# Altium PCB MainBoard.PcbDoc (part 4 of 5)
Units mm, origin at the board's own origin, x right, y up, seen from the top; angles counter-clockwise.
Board outline 82.5 x 82.5 mm, 2 copper layers (Top Layer, Bottom Layer); 145 components, 141 nets, 702 pads, 289 vias.
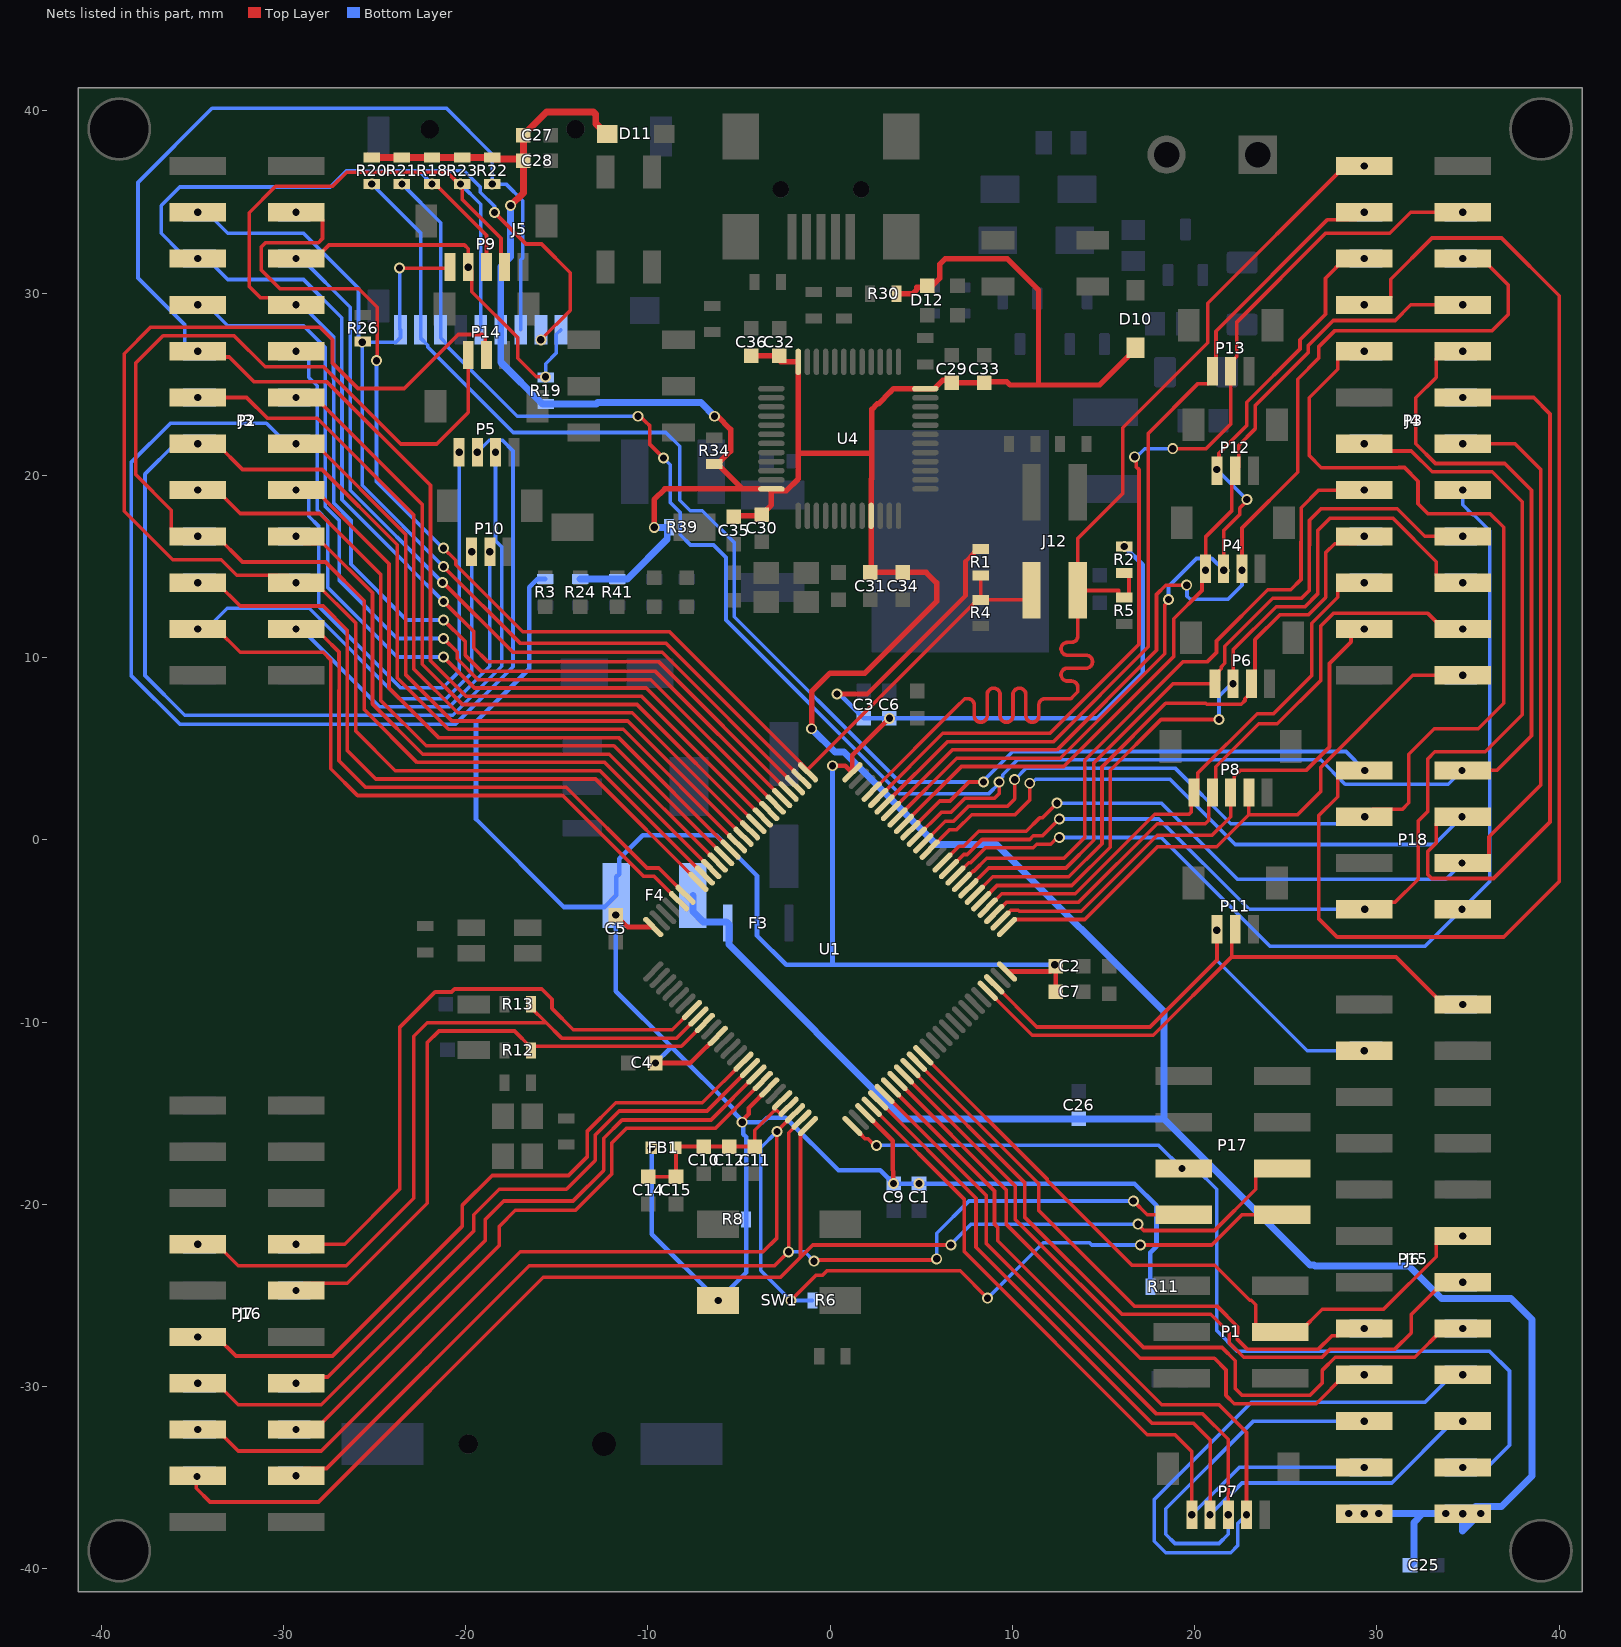
[diagram p2: the nets of this part, all layers, seen from the top]

## Via types
v1: diameter 0.6, hole 0.4, Top Layer to Bottom Layer, 223 vias
v2: diameter 0.6, hole 0.4, Top Layer to Bottom Layer, tented both sides, 66 vias

## Nets (pads, with @x,y where several pads share a name; then routed paths per layer and width w, separated by ;. In a path a pad name is that pad's centre, name@x,y a point inside that pad or via, vN(x,y) a via of type N, cw(c..) or ccw(c..) an arc to the next point about the centre after c; other vN are vias at no path point) (continued)
B10: (continued)
  Top Layer w0.2: U1.47@8.644,-8.28 11.086,-10.722 17.733,-10.722 22.025,-6.43 ; P11.2@22.225,-4.9 22.025,-5.1 22.025,-6.43 ; v1(34.7,-9.03) 33.65,-9.03 31.05,-6.43 22.025,-6.43
B11: J6.21 P11.1 P15.22 U1.48 | length 28.2
  Top Layer w0.2: U1.48@8.998,-7.927 11.339,-10.268 17.545,-10.268 21.225,-6.588 P11.1@21.225,-4.9
  Bottom Layer w0.2: v1(21.209,-4.953) 21.209,-6.604 26.175,-11.57 v1(29.3,-11.57)
B12: J4.23 P3.24 P8.4 U1.51 | length 32.7
  Top Layer w0.2: U1.51@9.705,-4.78 10.112,-4.374 13.964,-4.374 17.956,-0.381 21.209,-0.381 22.971,1.381 ; P8.4@22.971,2.593 22.971,1.381 ; v1(34.7,9.03) 31.969,9.03 26.924,3.985 26.924,2.667 25.638,1.381 22.971,1.381
B13: J4.22 P3.21 P8.3 U1.52 | length 30.7
  Top Layer w0.2: U1.52@9.351,-4.427 9.788,-3.99 9.794,-3.99 9.914,-3.87 10.32,-3.87 10.37,-3.92 13.776,-3.92 17.949,0.254 20.955,0.254 21.971,1.27 P8.3@21.971,2.593 22.171,2.793 22.171,3.492 22.489,3.81 26.107,3.81 27.396,5.099 27.396,9.677 28.579,10.859 28.579,11.17 28.979,11.57 v1(29.3,11.57)
B14: J4.21 P3.22 P8.2 U1.53 | length 36.1
  Top Layer w0.2: U1.53@8.998,-4.073 9.025,-4.073 9.682,-3.416 13.638,-3.416 17.942,0.889 20.584,0.889 20.771,1.076 20.771,2.393 21.158,2.78 21.158,4.013 23.517,6.372 24.533,6.372 26.924,8.763 26.924,11.745 27.603,12.424 32.796,12.424 33.65,11.57 v1(34.7,11.57)
B15: J4.20 P3.19 P8.1 U1.54 | length 31
  Top Layer w0.2: U1.54@8.644,-3.72 8.65,-3.72 9.408,-2.962 13.45,-2.962 17.808,1.397 19.685,1.397 19.802,1.514 19.802,2.424 20.171,2.793 20.171,3.668 23.426,6.923 24.322,6.923 26.416,9.017 26.416,11.879 27.85,13.313 27.85,13.71 28.25,14.11 v1(29.3,14.11)
C0: J7.12 P16.11 U1.15 | length 38.6
  Top Layer w0.2: v1(-34.7,-27.27) -33.65,-27.27 -32.599,-28.321 -27.305,-28.321 -20.193,-21.209 -20.193,-20.066 -18.542,-18.415 -14.351,-18.415 -13.335,-17.399 -13.335,-16.002 -11.757,-14.424 -7.01,-14.424 U1.15@-4.755,-12.17
C1: J7.13 P16.14 U1.16 | length 33.4
  Top Layer w0.2: v1(-29.3,-29.81) -28.962,-29.472 -27.567,-29.472 -19.558,-21.463 -19.558,-20.574 -18.161,-19.177 -14.471,-19.177 -12.881,-17.587 -12.881,-16.19 -11.569,-14.878 -6.757,-14.878 U1.16@-4.402,-12.523
C2: J7.14 P16.13 U1.17 | length 40.3
  Top Layer w0.2: v1(-34.7,-29.81) -33.65,-29.81 -32.472,-30.988 -27.927,-30.988 -18.923,-21.984 -18.923,-20.828 -17.907,-19.812 -14.104,-19.812 -12.427,-18.135 -12.427,-16.378 -11.416,-15.367 -6.539,-15.367 U1.17@-4.048,-12.877
C3: J7.15 P16.16 U1.18 | length 35.1
  Top Layer w0.2: v1(-29.3,-32.35) -28.25,-32.35 -18.161,-22.261 -18.161,-21.209 -17.272,-20.32 -13.97,-20.32 -11.973,-18.323 -11.973,-16.618 -11.176,-15.821 -6.285,-15.821 U1.18@-3.695,-13.23
C4: J6.7 P15.8 U1.33 | length 35.5
  Top Layer w0.2: U1.33@3.695,-13.23 3.695,-13.236 9.652,-19.193 9.652,-21.082 17.018,-28.448 21.082,-28.448 21.717,-29.083 21.717,-30.48 22.171,-30.934 26.666,-30.934 28.25,-29.35 v1(29.3,-29.35)
C5: J6.10 P15.9 U1.34 | length 41.8
  Top Layer w0.2: U1.34@4.048,-12.877 4.048,-12.882 10.16,-18.994 10.16,-20.828 17.186,-27.854 21.504,-27.854 22.225,-28.575 22.225,-30.099 22.606,-30.48 26.311,-30.48 27.008,-29.783 27.008,-29.091 27.705,-28.394 32.066,-28.394 33.65,-26.81 v1(34.7,-26.81)
C6: J4.11 P3.12 P18.4 U1.63 | length 73.7
  Top Layer w0.2: U1.63@5.462,-0.538 6.562,0.562 6.952,0.562 7.771,1.381 10.144,1.381 10.952,2.189 v2(10.952,3.106) ; v1(34.671,1.27) 33.65,1.27 33.25,0.87 33.25,-0.169 32.796,-0.623 32.796,-1.917 33.003,-2.124 36.397,-2.124 39.497,0.976 39.497,23.368 38.595,24.27 v1(34.7,24.27)
  Bottom Layer w0.2: v2(10.952,3.106) 11.06,3.106 11.275,3.321 18.65,3.321 22.225,-0.254 33.147,-0.254 v1(34.671,1.27)
C7: J4.10 P3.9 P18.3 U1.64 | length 70
  Top Layer w0.2: U1.64@5.109,-0.184 6.309,1.016 6.764,1.016 7.583,1.835 9.709,1.835 10.12,2.246 v2(10.12,3.302) ; v1(29.3,26.81) 28.25,26.81 27.85,26.41 27.85,25.818 26.289,24.257 26.289,21.082 26.949,20.422 31.185,20.422 31.191,20.428 31.508,20.428 32.254,19.681 32.254,18.443 32.815,17.882 36.22,17.882 36.957,17.145 36.957,7.493 35.56,6.096 33.147,6.096 31.75,4.699 31.75,2.032 31.388,1.67 29.737,1.67 v1(29.337,1.27)
  Bottom Layer w0.2: v2(10.12,3.302) 10.755,3.937 18.923,3.937 21.971,0.889 28.869,0.889 29.25,1.27 v1(29.337,1.27)
C8: J4.9 J5.7 P3.10 P18.2 R21.1 U1.65 | length 120.5
  Top Layer w0.2: v1(-10.541,23.241) -10.433,23.241 -10.073,22.882 -10.055,22.882 -9.906,22.733 -9.906,21.717 v1(-9.144,20.955) ; U1.65@4.755,0.17 6.091,1.505 6.611,1.505 7.395,2.289 9.02,2.289 9.271,2.54 v2(9.271,3.175) ; v1(34.67,3.81) P18.2@34.7,3.81 36.576,3.81 38.481,5.715 38.481,19.177 37.011,20.647 33.215,20.647 32.131,21.731 32.131,24.252 33.25,25.371 33.25,26.41 33.65,26.81 v1(34.7,26.81)
  Bottom Layer w0.2: v1(-23.495,35.978) -21.371,33.854 J5.7@-21.371,27.989 -21.371,27.539 -20.975,27.143 -20.975,27.042 -17.174,23.241 v1(-10.541,23.241) ; v1(-9.144,20.955) -9.144,20.951 -8.767,20.574 -8.767,18.503 -8.224,17.96 -8.224,16.74 -7.659,16.176 -6.397,16.176 -5.715,15.494 -5.715,12.058 3.822,2.521 8.688,2.521 9.271,3.104 v2(9.271,3.175) 9.271,3.283 9.466,3.479 9.466,3.573 10.285,4.391 26.909,4.391 28.252,3.048 33.909,3.048 v1(34.67,3.81)
C9: J4.8 J5.8 P3.7 P18.1 R20.1 U1.66 | length 152.9
  Top Layer w0.2: U1.66@4.402,0.523 4.407,0.523 6.017,2.132 6.577,2.132 7.62,3.175 v2(8.417,3.175) ; v1(29.3,29.35) 30.35,29.35 30.75,29.75 30.75,30.75 33.02,33.02 36.83,33.02 40.005,29.845 40.005,-2.286 36.957,-5.334 27.813,-5.334 26.797,-4.318 26.797,1.318 27.85,2.371 27.85,3.41 28.25,3.81 v1(29.337,3.81)
  Bottom Layer w0.2: v1(-25.146,35.978) -22.471,33.303 J5.8@-22.471,27.989 -22.471,27.539 -22.075,27.143 -22.075,27.042 -17.385,22.352 -9.017,22.352 -8.255,21.59 -8.255,18.633 -7.683,18.061 -7.012,18.061 -5.261,16.31 -5.261,12.246 3.81,3.175 v2(8.417,3.175) 8.417,3.246 10.016,4.845 28.302,4.845 v1(29.337,3.81)
C10: J3.20 J5.1 P2.19 P9.2 R19.1 U1.78 | length 67.1
  Top Layer w0.2: v1(-29.3,31.89) -28.25,31.89 -27.501,32.639 -20.066,32.639 -19.857,32.43 v1(-19.857,31.422) -19.657,31.222 -19.657,30.071 -17.145,27.559 -17.145,26.416 -16.129,25.4 v1(-15.621,25.4) ; v2(-21.271,14.123) -21.235,14.123 -17.399,10.287 -9.216,10.287 U1.78@-1.927,2.998
  Bottom Layer w0.2: v1(-29.3,31.89) -29,31.89 -26.33,29.22 -26.33,19.182 v2(-21.271,14.123) ; R19.1@-15.607,25.363 -15.607,26.121 -15.021,26.706 -15.021,27.739 J5.1@-14.771,27.989
C11: J3.19 J5.2 P2.20 P9.3 R18.1 U1.79 | length 92
  Top Layer w0.2: R18.1@-21.669,35.978 -18.857,33.166 P9.3@-18.857,31.422 ; v2(-21.209,13.081) -19.558,11.43 -19.558,10.541 -18.796,9.779 -9.415,9.779 U1.79@-2.28,2.644 ; v1(-18.415,34.417) -16.691,32.693 -15.835,32.693 -14.26,31.118 -14.26,29.047 v1(-15.875,27.432)
  Bottom Layer w0.2: v1(-21.844,35.978) -22.569,36.703 ; v2(-21.209,13.081) -23.168,15.04 -23.168,15.047 -26.784,18.663 -26.784,25.481 -26.797,25.494 -26.797,28.648 -28.893,30.743 -33.053,30.743 -34.2,31.89 J3.19@-34.6,31.89 v1(-34.7,31.89) -35.053,32.243 -35.672,32.243 -36.703,33.274 -36.703,34.798 -35.687,35.814 -27.432,35.814 -26.543,36.703 -25.728,36.703 -25.706,36.681 -23.836,36.681 -23.814,36.703 -22.569,36.703 ; v1(-18.415,34.417) -18.415,34.755 -19.196,35.536 -19.196,35.818 -20.081,36.703 -22.569,36.703
C12: J3.18 J5.5 P2.17 P9.4 R23.1 U1.80 | length 79
  Top Layer w0.2: v1(-29.3,29.35) -29.7,29.75 -31.274,29.75 -31.877,30.353 -31.877,34.404 -30.426,35.854 -27.303,35.854 -26.526,36.632 -21.022,36.632 -20.368,35.978 R23.1@-20.193,35.978 -20.193,35.144 -18.057,33.008 -18.057,31.622 P9.4@-17.857,31.422 ; v2(-21.209,12.065) -20.012,10.868 -20.012,10.12 -19.134,9.242 -9.585,9.242 U1.80@-2.634,2.291
  Bottom Layer w0.2: v1(-29.3,29.35) -29,29.35 -27.251,27.601 -27.251,25.306 -27.238,25.293 -27.238,18.475 -26.289,17.526 -26.289,15.113 -23.241,12.065 v2(-21.209,12.065) ; v1(-20.281,35.978) -19.171,34.869 J5.5@-19.171,27.989
C13: J7.7 P16.8 U1.7 | length 34.4
  Top Layer w0.2: v1(-29.3,-22.19) -26.635,-22.19 -23.622,-19.177 -23.622,-10.294 -21.675,-8.347 -20.769,-8.347 -20.605,-8.183 -15.82,-8.183 -15.262,-8.741 -15.262,-9.249 -14.097,-10.414 -8.662,-10.414 -7.589,-9.341 U1.7@-7.584,-9.341
C14: J7.8 P16.7 R13.2 U1.8 | length 40.9
  Top Layer w0.2: v1(-34.7,-22.19) -33.65,-22.19 -32.472,-23.368 -26.543,-23.368 -22.841,-19.666 -22.841,-10.776 -22.098,-10.033 -15.579,-10.033 ; R13.2@-16.42,-9.017 -16.42,-9.192 -15.579,-10.033 ; U1.8@-7.23,-9.695 -8.413,-10.877 -14.735,-10.877 -15.579,-10.033
C15: J7.9 P16.10 R12.1 U1.9 | length 34.6
  Top Layer w0.2: v1(-29.3,-24.73) -28.9,-24.33 -26.489,-24.33 -22.098,-19.939 -22.098,-11.122 -21.463,-10.487 -17.315,-10.487 -16.42,-11.382 R12.1@-16.42,-11.557 ; R12.1@-16.42,-11.506 -16.245,-11.331 -8.16,-11.331 -7.848,-11.02 U1.9@-6.877,-10.048
D0: J3.17 P2.18 U1.81 | length 50.3
  Top Layer w0.2: v2(-21.209,11.049) -20.466,10.306 -20.466,9.932 -19.322,8.788 -9.838,8.788 U1.81@-2.988,1.937
  Bottom Layer w0.2: v1(-34.7,29.35) -34.2,29.35 -33.053,28.203 -28.893,28.203 -27.705,27.016 -27.705,25.118 -27.692,25.105 -27.692,18.28 -26.924,17.512 -26.924,14.224 -23.749,11.049 v2(-21.209,11.049)
D1: J3.16 P2.15 U1.82 | length 43.2
  Top Layer w0.2: v2(-21.209,10.033) -19.51,8.334 -10.091,8.334 U1.82@-3.341,1.584
  Bottom Layer w0.2: v1(-29.3,26.81) -29,26.81 -28.6,26.41 -28.6,25.371 -28.146,24.917 -28.146,18.092 -27.559,17.505 -27.559,13.843 -23.749,10.033 v2(-21.209,10.033)
D2: J3.15 J5.3 P2.16 R22.1 U1.83 | length 91
  Top Layer w0.2: v1(-34.7,26.81) -34.38,26.49 -32.967,26.49 -31.601,25.124 -27.603,25.124 -21.93,19.451 -21.93,9.829 -19.981,7.88 -10.344,7.88 U1.83@-3.695,1.23
  Bottom Layer w0.2: v1(-34.7,26.81) -35,26.81 -35.4,27.21 -35.4,28.249 -37.973,30.822 -37.973,36.068 -33.909,40.132 -21.052,40.132 -18.542,37.622 v1(-18.542,35.978) -17.781,35.978 -16.872,35.069 -16.872,31.928 -16.971,31.829 J5.3@-16.971,27.989
D3: J3.14 P2.13 U1.84 | length 40.1
  Top Layer w0.2: v1(-29.3,24.27) -28.25,24.27 -22.384,18.404 -22.384,9.641 -20.169,7.426 -10.598,7.426 U1.84@-4.048,0.877
D4: J3.13 P2.14 U1.85 | length 45.1
  Top Layer w0.2: v1(-34.7,24.27) -32.017,24.27 -30.87,23.123 -28.143,23.123 -22.838,17.819 -22.838,9.376 -20.434,6.972 -10.856,6.972 -4.407,0.523 U1.85@-4.402,0.523
D5: J3.12 P2.11 P5.2 U1.86 | length 97.8
  Top Layer w0.2: v1(-29.3,21.73) -28.25,21.73 -23.292,16.772 -23.292,9.068 -20.742,6.518 -11.104,6.518 U1.86@-4.755,0.17
  Bottom Layer w0.2: v1(-29.3,21.73) -29.8,21.73 -30.93,22.86 -36.195,22.86 -38.354,20.701 -38.354,9.017 -35.687,6.35 -20.553,6.35 -17.399,9.504 -17.399,21.336 -17.979,21.916 -18.703,21.916 v1(-19.357,21.262)
D6: J3.11 P2.12 P5.3 U1.87 | length 91
  Top Layer w0.2: v1(-34.7,21.73) -33.65,21.73 -32.24,20.32 -27.879,20.32 -23.749,16.19 -23.749,8.88 -20.933,6.064 -11.357,6.064 U1.87@-5.109,-0.184
  Bottom Layer w0.2: v1(-34.7,21.73) -35.928,21.73 -37.592,20.066 -37.592,9.017 -35.414,6.839 -20.706,6.839 -18.015,9.53 -18.015,16.072 -18.357,16.414 v1(-18.357,21.262)
D7: J3.10 P2.9 P5.1 U1.88 | length 65
  Top Layer w0.2: v1(-29.3,19.19) -28.25,19.19 -24.203,15.143 -24.203,8.328 -21.485,5.61 -11.61,5.61 U1.88@-5.462,-0.538
  Bottom Layer w0.2: v1(-29.3,19.19) -29,19.19 -28.6,18.79 -28.6,17.751 -28.067,17.218 -28.067,12.834 -23.571,8.338 -21.253,8.338 -20.357,9.234 v1(-20.357,21.262)
D8: J4.19 P3.20 P6.2 U1.55 | length 43.4
  Top Layer w0.2: U1.55@8.291,-3.366 8.296,-3.366 9.155,-2.508 13.261,-2.508 15.367,-0.402 15.367,3.815 18.156,6.604 v1(21.336,6.604) ; v1(22.106,8.562) 22.106,10.43 24.471,12.795 26.048,12.795 26.743,13.49 26.743,15.986 26.754,15.997 26.754,16.975 27.432,17.653 30.861,17.653 33.25,15.264 33.25,14.51 33.65,14.11 v1(34.7,14.11)
  Bottom Layer w0.2: v1(21.336,6.604) 21.336,7.874 22.024,8.562 v1(22.106,8.562)
D9: J4.18 P3.17 P6.3 U1.56 | length 35.1
  Top Layer w0.2: U1.56@7.937,-3.012 7.943,-3.012 8.923,-2.032 13.095,-2.032 14.913,-0.214 14.913,4.003 18.403,7.493 20.599,7.493 20.659,7.433 22.553,7.433 22.76,7.64 22.76,7.741 23.106,8.087 P6.3@23.106,8.562 23.306,8.762 23.306,10.988 24.659,12.341 26.236,12.341 27.197,13.302 27.197,15.767 27.68,16.25 28.9,16.25 v1(29.3,16.65)
D10: J4.17 P3.18 P6.1 U1.57 | length 42
  Top Layer w0.2: U1.57@7.584,-2.659 8.7,-1.543 12.942,-1.543 14.459,-0.026 14.459,4.216 18.805,8.562 P6.1@21.106,8.562 21.306,8.762 21.306,9.241 21.452,9.387 21.452,9.484 21.652,9.684 21.652,10.618 24.283,13.249 25.86,13.249 26.289,13.678 26.289,16.153 26.3,16.164 26.3,17.537 26.924,18.161 31.115,18.161 32.626,16.65 v1(34.7,16.65)
D11: J4.16 P3.15 U1.58 | length 36.1
  Top Layer w0.2: U1.58@7.23,-2.305 7.656,-1.88 7.683,-1.88 7.855,-1.708 7.893,-1.708 8.585,-1.016 12.827,-1.016 13.97,0.127 13.97,4.369 19.38,9.779 20.701,9.779 21.198,10.276 21.198,10.911 24.003,13.716 25.273,13.716 25.835,14.278 25.835,16.341 25.846,16.352 25.846,18.226 26.81,19.19 v1(29.3,19.19)
D12: J4.15 P3.16 P18.8 U1.59 | length 56.3
  Top Layer w0.2: U1.59@6.877,-1.952 7.302,-1.526 7.329,-1.526 7.601,-1.254 7.705,-1.254 8.524,-0.435 11.136,-0.435 11.336,-0.235 12.103,-0.235 12.465,0.127 v2(12.573,0.127)
  Bottom Layer w0.2: v2(12.573,0.127) 18.161,0.127 24.13,-5.842 32.639,-5.842 v1(34.671,-3.81) 36.195,-2.286 36.195,16.956 35.307,17.843 35.247,17.843 34.7,18.39 v1(34.7,19.19)
D13: J4.14 P3.13 P18.7 U1.60 | length 64.3
  Top Layer w0.2: U1.60@6.523,-1.598 6.529,-1.598 7.327,-0.8 7.516,-0.8 8.335,0.019 10.948,0.019 11.148,0.219 11.649,0.219 v2(12.573,1.143) ; v1(29.3,21.73) 30.35,21.73 30.744,21.336 31.884,21.336 33.027,20.193 36.322,20.193 37.973,18.542 37.973,6.858 35.941,4.826 33.165,4.826 32.796,4.457 32.796,1.573 32.258,1.035 32.258,-2.159 30.991,-3.426 29.721,-3.426 v1(29.337,-3.81)
  Bottom Layer w0.2: v2(12.573,1.143) 18.034,1.143 22.987,-3.81 v1(29.337,-3.81)
D14: J4.13 P3.14 P18.6 U1.61 | length 60.8
  Top Layer w0.2: U1.61@6.17,-1.245 6.175,-1.245 7.074,-0.346 7.328,-0.346 8.147,0.473 10.76,0.473 11.492,1.205 11.638,1.205 v2(12.446,2.013) ; v1(34.671,-1.27) 35.75,-1.27 36.15,-0.87 36.15,0.169 38.989,3.008 38.989,20.32 37.579,21.73 v1(34.7,21.73)
  Bottom Layer w0.2: v2(12.446,2.013) 18.18,2.013 22.352,-2.159 33.782,-2.159 v1(34.671,-1.27)